# Altium PCB lab_1_kapustin_usb_spi.PcbDoc
Units mm, origin at the board's own origin, x right, y up, seen from the top; angles counter-clockwise.
Board outline 47 x 20 mm, 4 copper layers (Top Layer, Signal Layer 1, Signal Layer 2, Bottom Layer), stack 1.522 mm thick; 28 components, 28 nets, 98 pads, 112 vias.
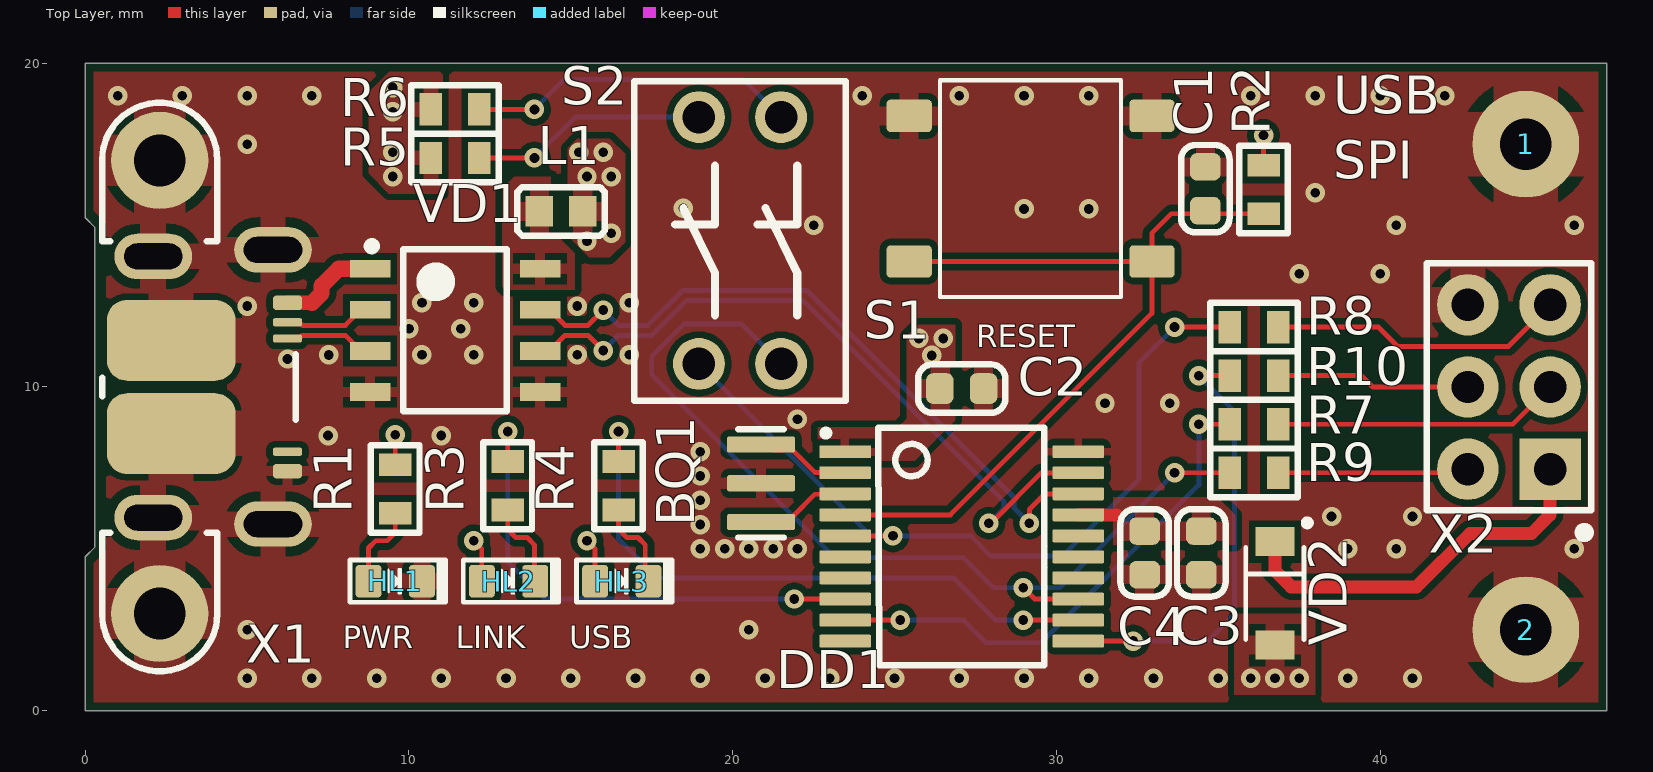
[diagram p0: Top Layer view]
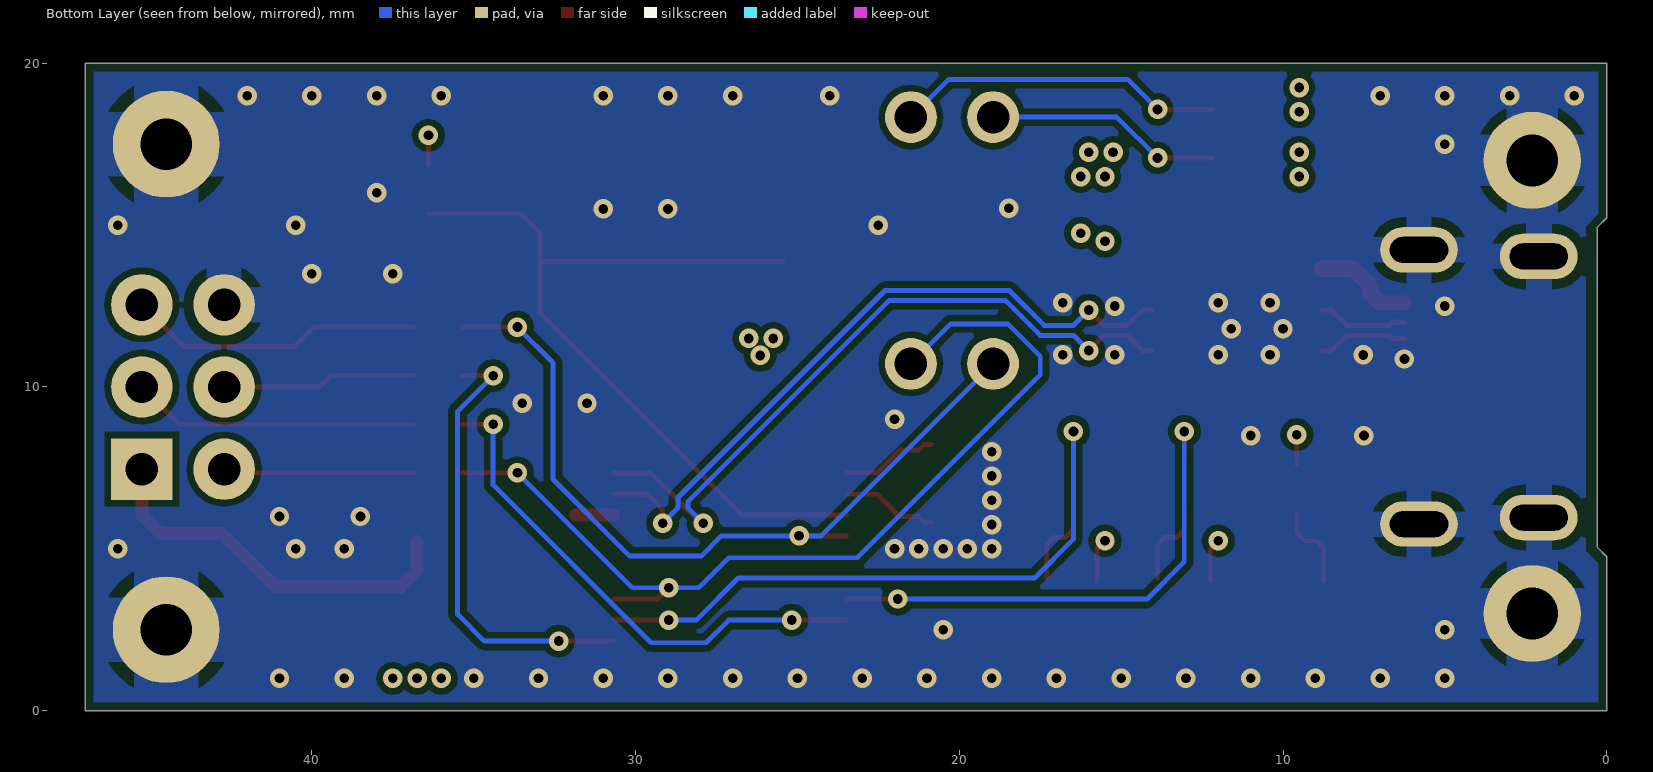
[diagram p1: Bottom Layer view, seen from below]
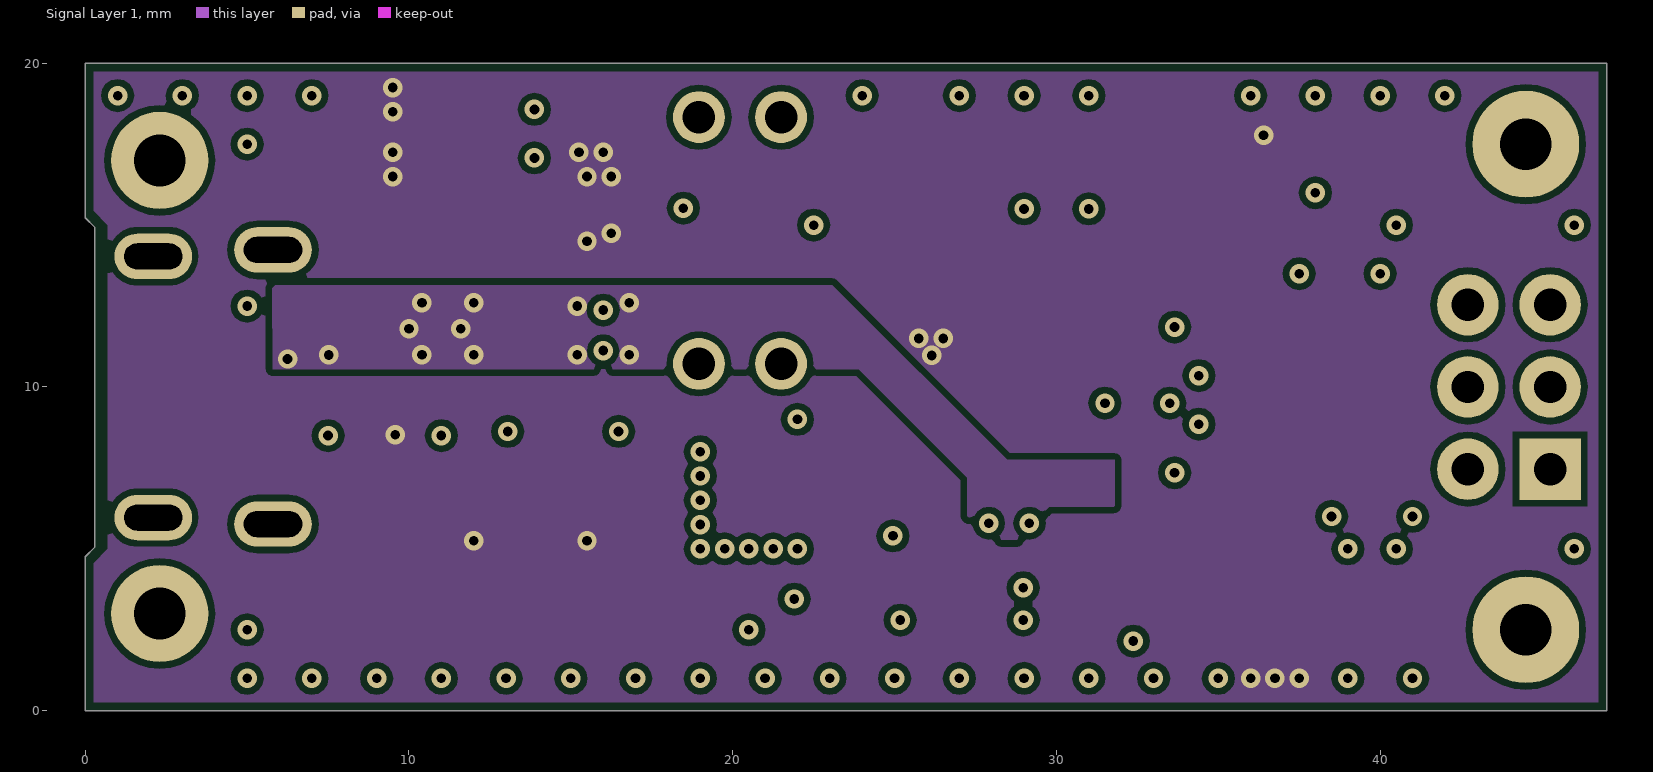
[diagram p2: Signal Layer 1]
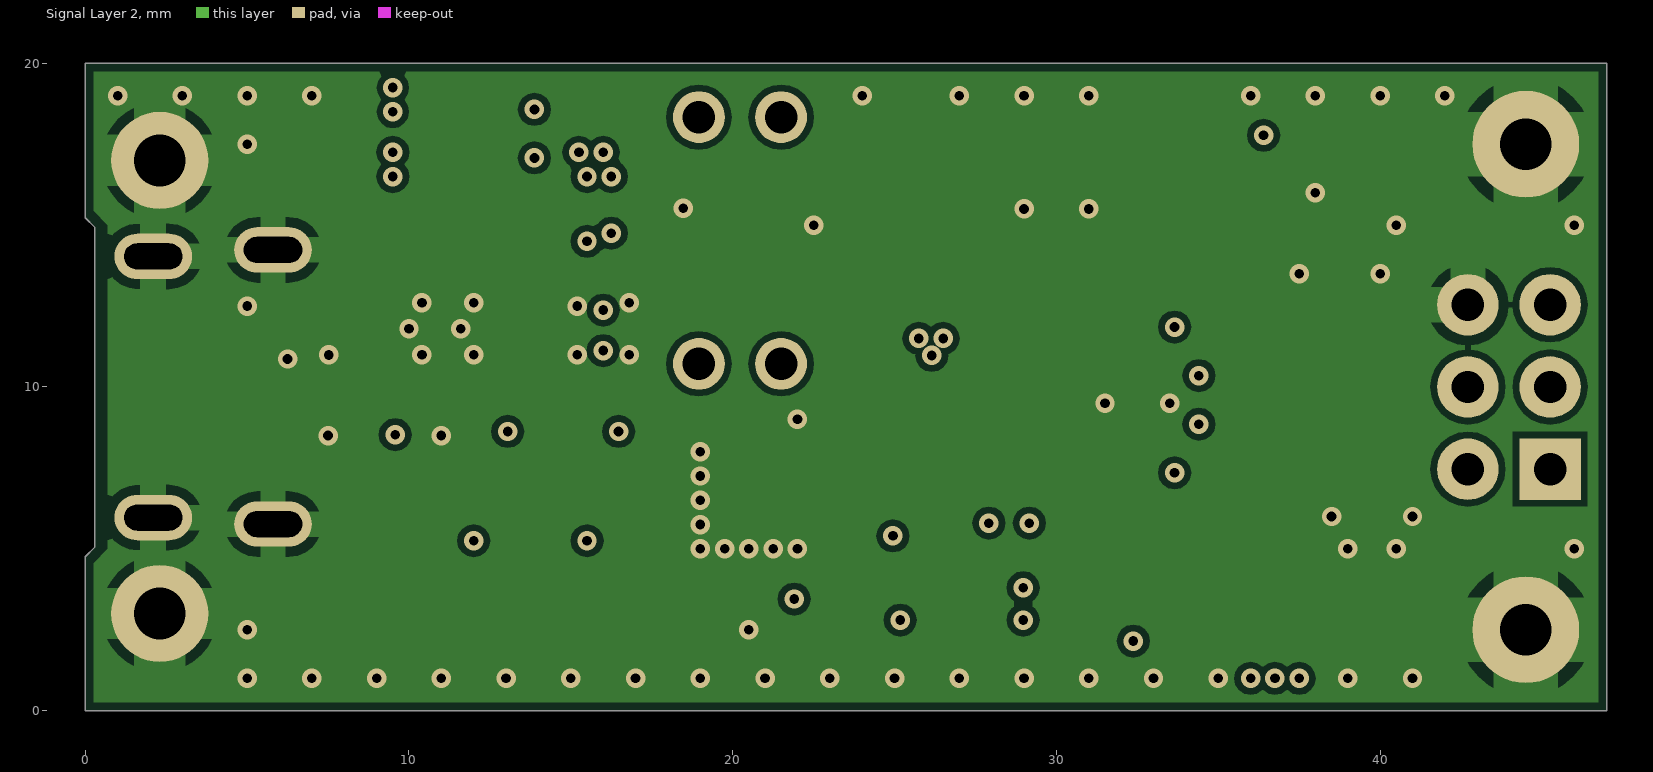
[diagram p3: Signal Layer 2]

## Layer stack, top to bottom
Top Solder: solder mask 0.0102, Solder Resist, Dk 3.5
Top Layer: signal copper 0.018
Prepreg 1: prepreg 0.125, FR4 HiTg170, Dk 5.07
Signal Layer 1: signal copper 0.018
Core 1: core 1.2, FR4, Dk 4.6
Signal Layer 2: signal copper 0.018
Prepreg 2: prepreg 0.125, FR4 HiTg170, Dk 5.07
Bottom Layer: signal copper 0.018
Bottom Solder: solder mask 0.0102, Solder Resist, Dk 3.5

## Board outline
0,0 0,4.755 0.3,5.055 0.3,14.925 0,15.225 0,20 47,20 47,0

## Design rules (kind name [scope] priority, off if disabled: settings)
AcuteAngle min_acute_angle [OnCopper] p1: minimum=3.50000000000000E+0001 checktracksonly=FALSE // Минимальный угол между примитивами топологии
BoardOutlineClearance board_outline_clearance_std [NOT (OnLayer('Bottom Overlay') OR OnLayer('Top Overlay'))] p1: gap=0.25 ignorepadtopadclearanceinfootprint=FALSE except(0: Arc-SplitContinuation Track-SplitContinuation SMDPad-SplitContinuation THPad-SplitContinuation Via-SplitContinuation Fill-SplitContinuation Poly-SplitContinuation Region-SplitContinuation Text-SplitContinuation) // Отступ элементов топологии от края фрезеруемой печатной платы
Clearance clearance_outer_18um_std [OnTopLayer OR OnBottomLayer] p1: gap=0.125 ignorepadtopadclearanceinfootprint=TRUE except(0.2: Arc-Fill Arc-Poly Track-Fill Track-Poly SMDPad-SMDPad SMDPad-Fill SMDPad-Poly THPad-Fill THPad-Poly Via-Fill Via-Poly Fill-Fill Fill-Poly Poly-Poly Poly-Region Poly-Text; 0.25: Arc-Hole Track-Hole SMDPad-Hole THPad-Hole Via-Hole Fill-Hole Poly-Hole Region-Hole Text-Hole) // Зазоры на внешних слоях
Clearance clearance_inner_18um_std [NOT (OnTopLayer Or OnBottomLayer)] p2: gap=0.125 ignorepadtopadclearanceinfootprint=FALSE except(0.2: Arc-Fill Arc-Poly Track-Fill Track-Poly SMDPad-SMDPad SMDPad-Fill SMDPad-Poly THPad-Fill THPad-Poly Via-Fill Via-Poly Fill-Fill Fill-Poly Poly-Poly Poly-Region Poly-Text; 0.25: Arc-Hole Track-Hole SMDPad-Hole THPad-Hole Via-Hole Fill-Hole Poly-Hole Region-Hole Text-Hole) // Зазоры на внутренних слоях
ComponentClearance [All] p1: gap=0 collisioncheckmode=3 verticalgap=0 showdistances=FALSE
DiffPairsRouting "Schematic Differential Pairs Routing_10" [InNet('USB_D_P')] p1: maxlimit=0.254 minlimit=0.15 mostfreqgap=0.254 toplayer_maxgap=0.15 toplayer_prefgap=0.15 toplayer_minwidth=0.155 toplayer_maxwidth=0.155 toplayer_prefwidth=0.155 bottomlayer_maxgap=0.15 bottomlayer_prefgap=0.15 bottomlayer_minwidth=0.155 bottomlayer_maxwidth=0.155 bottomlayer_prefwidth=0.155 impedanceprofiledriven=TRUE impedanceprofileid={1B1F1868-2FFB-4D51-908A-913D90CA9AFC} impedanceprofilevalue=95.000000 maxuncoupledlength=12.7
DiffPairsRouting "Schematic Differential Pairs Routing_9" [InNet('USB_D_N')] p2: maxlimit=0.254 minlimit=0.15 mostfreqgap=0.254 toplayer_maxgap=0.15 toplayer_prefgap=0.15 toplayer_minwidth=0.155 toplayer_maxwidth=0.155 toplayer_prefwidth=0.155 bottomlayer_maxgap=0.15 bottomlayer_prefgap=0.15 bottomlayer_minwidth=0.155 bottomlayer_maxwidth=0.155 bottomlayer_prefwidth=0.155 impedanceprofiledriven=TRUE impedanceprofileid={1B1F1868-2FFB-4D51-908A-913D90CA9AFC} impedanceprofilevalue=95.000000 maxuncoupledlength=12.7
DiffPairsRouting "Schematic Differential Pairs Routing_8" [InNet('CN_D_P')] p3: maxlimit=0.254 minlimit=0.15 mostfreqgap=0.254 toplayer_maxgap=0.15 toplayer_prefgap=0.15 toplayer_minwidth=0.155 toplayer_maxwidth=0.155 toplayer_prefwidth=0.155 bottomlayer_maxgap=0.15 bottomlayer_prefgap=0.15 bottomlayer_minwidth=0.155 bottomlayer_maxwidth=0.155 bottomlayer_prefwidth=0.155 impedanceprofiledriven=TRUE impedanceprofileid={1B1F1868-2FFB-4D51-908A-913D90CA9AFC} impedanceprofilevalue=95.000000 maxuncoupledlength=12.7
DiffPairsRouting "Schematic Differential Pairs Routing" [InNet('CN_D_N')] p4: maxlimit=0.254 minlimit=0.15 mostfreqgap=0.254 toplayer_maxgap=0.15 toplayer_prefgap=0.15 toplayer_minwidth=0.155 toplayer_maxwidth=0.155 toplayer_prefwidth=0.155 bottomlayer_maxgap=0.15 bottomlayer_prefgap=0.15 bottomlayer_minwidth=0.155 bottomlayer_maxwidth=0.155 bottomlayer_prefwidth=0.155 impedanceprofiledriven=TRUE impedanceprofileid={1B1F1868-2FFB-4D51-908A-913D90CA9AFC} impedanceprofilevalue=95.000000 maxuncoupledlength=12.7
DiffPairsRouting "Schematic Differential Pairs Routing_3" [InNet('USB_D_N')] p5: maxlimit=0.254 minlimit=0.15 mostfreqgap=0.254 toplayer_maxgap=0.15 toplayer_prefgap=0.15 toplayer_minwidth=0.155 toplayer_maxwidth=0.155 toplayer_prefwidth=0.155 bottomlayer_maxgap=0.15 bottomlayer_prefgap=0.15 bottomlayer_minwidth=0.155 bottomlayer_maxwidth=0.155 bottomlayer_prefwidth=0.155 impedanceprofiledriven=TRUE impedanceprofileid={1B1F1868-2FFB-4D51-908A-913D90CA9AFC} impedanceprofilevalue=95.000000 maxuncoupledlength=12.7
DiffPairsRouting "Schematic Differential Pairs Routing_2" [InNet('D_IN_N')] p6: maxlimit=0.254 minlimit=0.15 mostfreqgap=0.254 toplayer_maxgap=0.15 toplayer_prefgap=0.15 toplayer_minwidth=0.155 toplayer_maxwidth=0.155 toplayer_prefwidth=0.155 bottomlayer_maxgap=0.15 bottomlayer_prefgap=0.15 bottomlayer_minwidth=0.155 bottomlayer_maxwidth=0.155 bottomlayer_prefwidth=0.155 impedanceprofiledriven=TRUE impedanceprofileid={1B1F1868-2FFB-4D51-908A-913D90CA9AFC} impedanceprofilevalue=95.000000 maxuncoupledlength=12.7
DiffPairsRouting diff_pairs_routing [All] p7: maxlimit=0.254 minlimit=0.127 mostfreqgap=0.254 toplayer_maxgap=0.127 toplayer_prefgap=0.127 toplayer_minwidth=0.143 toplayer_maxwidth=0.143 toplayer_prefwidth=0.143 midlayer1_minwidth=0.381 midlayer1_maxwidth=0.381 midlayer1_prefwidth=0.381 midlayer2_minwidth=0.381 midlayer2_maxwidth=0.381 midlayer2_prefwidth=0.381 bottomlayer_maxgap=0.127 bottomlayer_prefgap=0.127 bottomlayer_minwidth=0.143 bottomlayer_maxwidth=0.143 bottomlayer_prefwidth=0.143 impedanceprofiledriven=TRUE impedanceprofileid={FD46899E-B5A2-4EF5-A302-5D2DB6A51F35} maxuncoupledlength=12.7 // Правила трассировки дифференциальных пар
HoleSize min_hole_size_std [IsPad] p1: absolutevalues=TRUE maxlimit=5.9 minlimit=0.6 maxpercent=80.000 minpercent=20.000 // Диаметр межслойного переходного отверстия
HoleSize min_hole_size_via_std [IsVia] p2: absolutevalues=TRUE maxlimit=5.9 minlimit=0.3 maxpercent=80.000 minpercent=20.000 // Минимальный диаметр монтажного отверстия
HoleToHoleClearance hole_to_hole_clearance_std [All] p1: gap=0.2 allowstackedmicrovias=FALSE // Минимальное расстояние между краями двух отверстий
MinimumAnnularRing min_via_ar_std [All] p1: minimumring=0.15 // Поясок площадки переходного отверстия (Annular ring VIA)
MinimumAnnularRing min_pad_ar_std [All] p2: minimumring=0.2 // Поясок монтажной контактной площадки (Annular ring PAD)
MinimumSolderMaskSliver min_solder_mask_bridge_std [All] p1: minsoldermaskwidth=0.15 // Мнимальная ширина масочного мостика
PlaneClearance plane_clearance_18um_std [All] p1: clearance=0.2 // Отступ полигона (для слоя plane) от элементов топологии
PlaneConnect [All] p1: planeconnectstyle=Relief reliefexpansion=0.5 reliefentries=4 reliefconductorwidth=0.2 reliefairgap=0.2
PolygonConnect poly_connect_to_pad<=0.3 [(AsMM(PadXSize_AllLayers)<=0.301) or (AsMM(PadYSize_AllLayers)<=0.301)] p1: thpad.connectstyle=Relief thpad.reliefconductorwidth=0.2 thpad.reliefentries=4 thpad.polygonreliefangle="90 Angle" thpad.airgapwidth=0.2 smdpad.connectstyle=Relief smdpad.reliefconductorwidth=0.2 smdpad.reliefentries=4 smdpad.polygonreliefangle="90 Angle" smdpad.airgapwidth=0.2 via.connectstyle=Direct via.reliefconductorwidth=0.254 via.reliefentries=4 via.polygonreliefangle="90 Angle" via.airgapwidth=0.254 // Правила подключения полигонов для падов от 0,3мм и меньше
PolygonConnect poly_connect_to_pad<=0.4 [(AsMM(PadXSize_AllLayers)<=0.401) or (AsMM(PadYSize_AllLayers)<=0.401)] p2: thpad.connectstyle=Relief thpad.reliefconductorwidth=0.26 thpad.reliefentries=4 thpad.polygonreliefangle="90 Angle" thpad.airgapwidth=0.2 smdpad.connectstyle=Relief smdpad.reliefconductorwidth=0.26 smdpad.reliefentries=4 smdpad.polygonreliefangle="90 Angle" smdpad.airgapwidth=0.2 via.connectstyle=Direct via.reliefconductorwidth=0.254 via.reliefentries=4 via.polygonreliefangle="90 Angle" via.airgapwidth=0.254 // Правила подключения полигонов для падов от 0,4 и меньше
PolygonConnect poly_connect_to_pad<=0.6 [(AsMM(PadXSize_AllLayers)<=0.601) or (AsMM(PadYSize_AllLayers)<=0.601)] p3: thpad.connectstyle=Relief thpad.reliefconductorwidth=0.33 thpad.reliefentries=4 thpad.polygonreliefangle="90 Angle" thpad.airgapwidth=0.2 smdpad.connectstyle=Relief smdpad.reliefconductorwidth=0.33 smdpad.reliefentries=4 smdpad.polygonreliefangle="90 Angle" smdpad.airgapwidth=0.2 via.connectstyle=Direct via.reliefconductorwidth=0.254 via.reliefentries=4 via.polygonreliefangle="90 Angle" via.airgapwidth=0.254 // Правила подключения полигонов для падов от 0,6мм и меньше
PolygonConnect poly_connect_to_pad<=0.7 [(AsMM(PadXSize_AllLayers)<=0.701) or (AsMM(PadYSize_AllLayers)<=0.701)] p4: thpad.connectstyle=Relief thpad.reliefconductorwidth=0.46 thpad.reliefentries=4 thpad.polygonreliefangle="90 Angle" thpad.airgapwidth=0.2 smdpad.connectstyle=Relief smdpad.reliefconductorwidth=0.46 smdpad.reliefentries=4 smdpad.polygonreliefangle="90 Angle" smdpad.airgapwidth=0.2 via.connectstyle=Direct via.reliefconductorwidth=0.254 via.reliefentries=4 via.polygonreliefangle="90 Angle" via.airgapwidth=0.254 // Правила подключения полигонов для падов от 0,7мм и меньше
PolygonConnect poly_connect_to_pad<=0.8 [(AsMM(PadXSize_AllLayers)<=0.8)or(AsMM(PadYSize_AllLayers)<=0.8)] p5: thpad.connectstyle=Relief thpad.reliefconductorwidth=0.53 thpad.reliefentries=4 thpad.polygonreliefangle="90 Angle" thpad.airgapwidth=0.3 smdpad.connectstyle=Relief smdpad.reliefconductorwidth=0.53 smdpad.reliefentries=4 smdpad.polygonreliefangle="90 Angle" smdpad.airgapwidth=0.2 via.connectstyle=Direct via.reliefconductorwidth=0.254 via.reliefentries=4 via.polygonreliefangle="90 Angle" via.airgapwidth=0.254 // Правила подключения полигонов для падов от 0,8мм и меньше
PolygonConnect poly_connect_to_pad<=1 [(AsMM(PadXSize_AllLayers)<=1.01)or(AsMM(PadYSize_AllLayers)<=1.01)] p6: thpad.connectstyle=Relief thpad.reliefconductorwidth=0.6 thpad.reliefentries=4 thpad.polygonreliefangle="90 Angle" thpad.airgapwidth=0.3 smdpad.connectstyle=Relief smdpad.reliefconductorwidth=0.6 smdpad.reliefentries=4 smdpad.polygonreliefangle="90 Angle" smdpad.airgapwidth=0.2 via.connectstyle=Direct via.reliefconductorwidth=0.254 via.reliefentries=4 via.polygonreliefangle="90 Angle" via.airgapwidth=0.254 // Правила подключения полигонов для падов от 1мм и меньше
PolygonConnect poly_connect_to_pad<=1.3 [(AsMM(PadXSize_AllLayers)<=1.31)or(AsMM(PadYSize_AllLayers)<=1.31)] p7: thpad.connectstyle=Relief thpad.reliefconductorwidth=0.66 thpad.reliefentries=4 thpad.polygonreliefangle="90 Angle" thpad.airgapwidth=0.3 smdpad.connectstyle=Relief smdpad.reliefconductorwidth=0.86 smdpad.reliefentries=4 smdpad.polygonreliefangle="90 Angle" smdpad.airgapwidth=0.2 via.connectstyle=Direct via.reliefconductorwidth=0.254 via.reliefentries=4 via.polygonreliefangle="90 Angle" via.airgapwidth=0.254 // Правила подключения полигонов для падов от 1,3мм и меньше
PolygonConnect poly_connect_to_pad<=1.6 [(AsMM(PadXSize_AllLayers)<=1.61)or(AsMM(PadYSize_AllLayers)<=1.61)] p8: thpad.connectstyle=Relief thpad.reliefconductorwidth=0.8 thpad.reliefentries=4 thpad.polygonreliefangle="90 Angle" thpad.airgapwidth=0.3 smdpad.connectstyle=Relief smdpad.reliefconductorwidth=1 smdpad.reliefentries=4 smdpad.polygonreliefangle="90 Angle" smdpad.airgapwidth=0.2 via.connectstyle=Direct via.reliefconductorwidth=0.254 via.reliefentries=4 via.polygonreliefangle="90 Angle" via.airgapwidth=0.254 // Правила подключения полигонов для падов от 1,6мм и меньше
PolygonConnect poly_connect_to_pad<=1.8 [(AsMM(PadXSize_AllLayers)<=1.8)or(AsMM(PadYSize_AllLayers)<=1.8)] p9: thpad.connectstyle=Relief thpad.reliefconductorwidth=1 thpad.reliefentries=4 thpad.polygonreliefangle="90 Angle" thpad.airgapwidth=0.3 smdpad.connectstyle=Relief smdpad.reliefconductorwidth=1.2 smdpad.reliefentries=4 smdpad.polygonreliefangle="90 Angle" smdpad.airgapwidth=0.2 via.connectstyle=Direct via.reliefconductorwidth=0.254 via.reliefentries=4 via.polygonreliefangle="90 Angle" via.airgapwidth=0.254 // Правила подключения полигонов для падов от 1,8мм и меньше
PolygonConnect poly_connect_to_pad<=2 [(AsMM(PadXSize_AllLayers)<=2.01)or(AsMM(PadYSize_AllLayers)<=2.01)] p10: thpad.connectstyle=Relief thpad.reliefconductorwidth=1.1 thpad.reliefentries=4 thpad.polygonreliefangle="90 Angle" thpad.airgapwidth=0.3 smdpad.connectstyle=Relief smdpad.reliefconductorwidth=1.4 smdpad.reliefentries=4 smdpad.polygonreliefangle="90 Angle" smdpad.airgapwidth=0.2 via.connectstyle=Direct via.reliefconductorwidth=0.254 via.reliefentries=4 via.polygonreliefangle="90 Angle" via.airgapwidth=0.254 // Правила подключения полигонов для падов от 2мм и меньше
PolygonConnect poly_connect_to_pad<=2.3 [(AsMM(PadXSize_AllLayers)<=2.31)or(AsMM(PadYSize_AllLayers)<=2.31)] p11: thpad.connectstyle=Relief thpad.reliefconductorwidth=1.2 thpad.reliefentries=4 thpad.polygonreliefangle="90 Angle" thpad.airgapwidth=0.3 smdpad.connectstyle=Relief smdpad.reliefconductorwidth=1.4 smdpad.reliefentries=4 smdpad.polygonreliefangle="90 Angle" smdpad.airgapwidth=0.2 via.connectstyle=Direct via.reliefconductorwidth=0.254 via.reliefentries=4 via.polygonreliefangle="90 Angle" via.airgapwidth=0.254 // Правила подключения полигонов для падов от 2,3мм и меньше
PolygonConnect poly_connect_to_pad<=2.5 [(AsMM(PadXSize_AllLayers)<=2.51)or(AsMM(PadYSize_AllLayers)<=2.51)] p12: thpad.connectstyle=Relief thpad.reliefconductorwidth=1.2 thpad.reliefentries=4 thpad.polygonreliefangle="90 Angle" thpad.airgapwidth=0.3 smdpad.connectstyle=Relief smdpad.reliefconductorwidth=1.4 smdpad.reliefentries=4 smdpad.polygonreliefangle="90 Angle" smdpad.airgapwidth=0.2 via.connectstyle=Direct via.reliefconductorwidth=0.254 via.reliefentries=4 via.polygonreliefangle="90 Angle" via.airgapwidth=0.254 // Правила подключения полигонов для падов от 2,5мм и меньше
PolygonConnect poly_connect_to_pad<=2.7 [(AsMM(PadXSize_AllLayers)<=2.71)or(AsMM(PadYSize_AllLayers)<=2.71)] p13: thpad.connectstyle=Relief thpad.reliefconductorwidth=1.4 thpad.reliefentries=4 thpad.polygonreliefangle="90 Angle" thpad.airgapwidth=0.3 smdpad.connectstyle=Relief smdpad.reliefconductorwidth=1.6 smdpad.reliefentries=4 smdpad.polygonreliefangle="90 Angle" smdpad.airgapwidth=0.2 via.connectstyle=Direct via.reliefconductorwidth=0.254 via.reliefentries=4 via.polygonreliefangle="90 Angle" via.airgapwidth=0.254 // Правила подключения полигонов для падов от 2,7мм и меньше
PolygonConnect poly_connect_to_pad<=3 [(AsMM(PadXSize_AllLayers)<=3.01)or(AsMM(PadYSize_AllLayers)<=3.01)] p14: thpad.connectstyle=Relief thpad.reliefconductorwidth=1.6 thpad.reliefentries=4 thpad.polygonreliefangle="90 Angle" thpad.airgapwidth=0.3 smdpad.connectstyle=Relief smdpad.reliefconductorwidth=1.8 smdpad.reliefentries=4 smdpad.polygonreliefangle="90 Angle" smdpad.airgapwidth=0.2 via.connectstyle=Direct via.reliefconductorwidth=0.254 via.reliefentries=4 via.polygonreliefangle="90 Angle" via.airgapwidth=0.254 // Правила подключения полигонов для падов от 3мм и меньше
PolygonConnect poly_connect_to_pad<=7 [(AsMM(PadXSize_AllLayers)<7.01)or(AsMM(PadYSize_AllLayers)<=7.01)] p15: thpad.connectstyle=Relief thpad.reliefconductorwidth=2 thpad.reliefentries=4 thpad.polygonreliefangle="90 Angle" thpad.airgapwidth=0.4 smdpad.connectstyle=Relief smdpad.reliefconductorwidth=2 smdpad.reliefentries=4 smdpad.polygonreliefangle="90 Angle" smdpad.airgapwidth=0.3 via.connectstyle=Direct via.reliefconductorwidth=0.254 via.reliefentries=4 via.polygonreliefangle="90 Angle" via.airgapwidth=0.254 // Правила подключения полигонов для падов от 7мм и меньше
PolygonConnect poly_connect_to_pad [All] p16: thpad.connectstyle=Relief thpad.reliefconductorwidth=0.25 thpad.reliefentries=4 thpad.polygonreliefangle="90 Angle" thpad.airgapwidth=0.2 smdpad.connectstyle=Relief smdpad.reliefconductorwidth=0.25 smdpad.reliefentries=4 smdpad.polygonreliefangle="90 Angle" smdpad.airgapwidth=0.2 via.connectstyle=Direct via.reliefconductorwidth=0.25 via.reliefentries=4 via.polygonreliefangle="90 Angle" via.airgapwidth=0.2 // Правила подключения полигонов общие
RoutingCorners [All] p1 off: cornerstyle=45-Degree minsetback=2.5 maxsetback=2.5
RoutingVias [All] p1: holewidth=0.3 width=0.6 viastyle="Through Hole" minholewidth=0.3 minwidth=0.6 maxholewidth=5.9 maxwidth=6.4
SilkToSilkClearance silk_to_silk_clearance_std [All] p1 off: silktosilkclearance=0.15 // Отступ текста шелкографии от других примитивов шелкографии
SilkToSolderMaskClearance silk_to_solder_mask_clearance_std [IsPad] p1 off: minsilkscreentomaskgap=0.15 clearancetoexposedcopper=FALSE // Минимальное расстояние между элементами шелкографии и вскрытой медью
SolderMaskExpansion solder_mask_expansion_std [All] p1: expansion=0.05 // Припуск паяльной масски
UnRoutedNet [All] p1: checkbadconnections=TRUE
Width width_18um_std [All] p1: maxlimit=10 minlimit=0.125 preferedwidth=0.15 checkconnectedcopper=TRUE // Ширина проводников (общая)
19 further rules are at their usual default settings.

## Classes and differential pairs
differential pair class USB_SIGNALS: CN_D USB_D
component class +5V: X2
differential pair USB_D: +USB_D_P -USB_D_N
differential pair CN_D: +CN_D_P -CN_D_N

## Components (designator, comment, footprint, x,y, rotation, side; value= is the part's Value field where it differs from the comment)
1 "MOUNTING_HOLE" HOLE_1,6X3,3 44.5,17.5 r90 top
2 "MOUNTING_HOLE" HOLE_1,6X3,3 44.5,2.5 r90 top
BQ1 "CSTCE12M0G52A-R0" CSTCE-3_320X130X40 20.875,7.025 r0 top
C1 "0,1 мк" C0603 34.6,16.125 r270 top
C2 "4,7 мк" C0603 27.075,9.95 r0 top
C3 "2,2 мк" C0603 34.475,4.875 r270 top
C4 "0,22 мк" C0603 32.725,4.875 r270 top
DD1 "MCP2210-I/SS" SSOP-20_780X720X200 27.075,5.075 r0 top
HL1 "KP-1608SGC" D0603 9.575,4 r0 top
HL2 "KP-1608YC" D0603 13.075,4 r0 top
HL3 "KP-1608YC" D0603 16.575,4 r0 top
L1 "BLM18PG221SN1D" L0603 14.7,15.425 r0 top
R1 "220" R0603 9.575,6.85 r90 top
R2 "10 к" R0603 36.4,16.1 r270 top
R3 "330" R0603 13.05,6.95 r270 top
R4 "330" R0603 16.475,6.95 r270 top
R5 "10 к" R0603 11.425,17.075 r180 top
R6 "10 к" R0603 11.425,18.575 r180 top
R7 "33" R0603 36.1,8.85 r0 top
R8 "33" R0603 36.1,11.85 r0 top
R9 "33" R0603 36.1,7.35 r0 top
R10 "33" R0603 36.1,10.35 r0 top
S1 "KLS7-TS6604-5.0-180-B" KLS7-TS6604_500 29.2,16.125 r0 top
S2 "DS1040-02RN" DS1040-02RN 20.225,14.525 r0 top
VD1 "USB6B1" SO-8 11.425,11.75 r0 top
VD2 "MBR140SFT1G" SOD-123FL_290X180X98 36.75,3.625 r90 top
X1 "2108877-1" 2108877-1 2.55,10 r90 top
X2 "DS1021-2*3SF11" PLS-2,54-2X3-THT-V 43.98,10 r90 top

## Footprints (in the part's own frame and the unit in brackets; to place one, negate y for a bottom-side part, rotate by r counter-clockwise, add the part's x,y. Pads: shape width x height; smd on the part's side, far side on the other; paste and mask are expansions set on the pad)
2108877-1 [mm] "Micro USB-B, Flanged"
  rrect50% 0.45x0.9 smd: 1(2.6,-3.696) 5(-2.6,-3.696)
  rrect50% 0.25x0.9 smd: 2(2,-3.696) 3(1.5,-3.696) 4(-2,-3.696)
  round 3 hole 1.6: TP1(-7,0.25) TP1(7,0.25)
  oval 1.4x2.4 hole 0.8 slot 1.8 at 90 deg mask+0.102: TP1(-4.235,-3.25) TP1(-4.035,0.45) TP1(4.035,0.45) TP1(4.235,-3.25)
  rrect50% 2.5x3.98 smd: TP1(-1.441,-0.104) TP1(1.441,-0.104)
  silkscreen extent -8.78,-3.95 8.78,2.03, body extent -8.9,-3.95 8.9,3.95, height 3.39
C0603 [mm] "Chip Capacitor, 2-Leads, Body 1,60x0,80mm, IPC Medium Density"
  rrect50% 0.85x0.95 smd: 1(-0.675,0) 2(0.675,0)
  Top Layer pour cut-out: -0.254,0.5 -0.254,-0.5 0.254,-0.5 0.254,0.5
  silkscreen extent -1.35,-0.75 1.35,0.75, body extent -0.85,-0.45 0.85,0.45, height 0.9
CSTCE-3_320X130X40 [mm] "CSTCE_G15C/CSTCE_G/CSTCE_G_Z"
  rrect25% 2.1x0.5 smd paste-0.025 mask+0.1: 1(0,1.2) 2(0,0) 3(0,-1.2)
  silkscreen extent -0.7,-1.67 0.7,1.68, body extent -0.7,-1.68 0.7,1.67, height 0.75
D0603 [mm]
  rrect25% 0.8x1 smd paste-10 mask+0.1: 1(-0.825,0) 2(0.825,0)
  silkscreen extent -1.4,-0.65 1.55,0.65, body extent -0.81,-0.4 0.81,0.4, height 0.6
DS1040-02RN [mm]
  round 1.6 hole 1: 1(-1.27,3.81) 2(-1.27,-3.81) 3(1.27,3.81) 4(1.27,-3.81)
  silkscreen extent -3.27,-4.95 3.27,4.92, body extent -3.27,-4.95 3.27,4.95, height 6.8
HOLE_1,6X3,3 [mm]
  round 3.3 hole 1.6: 1(0,0)
KLS7-TS6604_500 [mm] "6.5x6.5mm SMD tact switch 5mm stem"
  rrect25% 1.4x1 smd: 1(-3.75,2.25) 1(3.75,2.25) 2(-3.75,-2.25) 2(3.75,-2.25)
  silkscreen extent -2.79,-3.35 2.79,3.35, body extent -4,-3.25 4,3.25, height 4.3
L0603 [mm]
  rect 0.85x0.95 smd: 1(-0.675,0) 2(0.675,0)
  silkscreen extent -1.35,-0.75 1.35,0.75, body extent -0.85,-0.45 0.85,0.45, height 0.9
PLS-2,54-2X3-THT-V [mm] "PLS-2x3"
  rect 1.9x1.9 hole 1: 1(-2.54,-1.27)
  round 1.9 hole 1: 2(-2.54,1.27) 3(0,-1.27)
  round 1.9 hole 1 mask+0.102: 4(0,1.27) 5(2.54,-1.27) 6(2.54,1.27)
  silkscreen extent -4.5,-2.55 3.81,2.54, body extent -3.81,-2.54 3.81,2.54, height 8.59
R0603 [mm]
  rect 0.7x1 smd: 1(-0.75,0) 2(0.75,0)
  silkscreen extent -1.35,-0.75 1.35,0.75, body extent -0.8,-0.43 0.8,0.42, height 0.45
SO-8 [mm]
  rect 1.25x0.55 smd: 1(-2.625,1.905) 2(-2.625,0.635) 3(-2.625,-0.635) 4(-2.625,-1.905) 5(2.625,-1.905) 6(2.625,-0.635) 7(2.625,0.635) 8(2.625,1.905)
  silkscreen extent -2.7,-2.5 1.6,2.72, body extent -3.1,-2.5 3.1,2.5, height 1.75
SOD-123FL_290X180X98 [mm]
  rect 0.9x1.2 smd: 1(-1.6,0) 2(1.6,0)
  silkscreen extent -1.43,-1.1 2.28,0.9, body extent -1.83,-0.83 1.87,0.77, height 1.12
SSOP-20_780X720X200 [mm] "SSOP-20, 7,8mm x 7,2mm, pitch 0,65mm"
  rect 1.6x0.4 smd paste-0.025 mask+0.05: 1(-3.6,2.925)
  rrect25% 1.6x0.4 smd paste-0.025 mask+0.05: 2(-3.6,2.275) 3(-3.6,1.625) 4(-3.6,0.975) 5(-3.6,0.325) 6(-3.6,-0.325) 7(-3.6,-0.975) 8(-3.6,-1.625) 9(-3.6,-2.275) 10(-3.6,-2.925) 11(3.6,-2.925) 12(3.6,-2.275) 13(3.6,-1.625) 14(3.6,-0.975) 15(3.6,-0.325) 16(3.6,0.325) 17(3.6,0.975) 18(3.6,1.625) 19(3.6,2.275) 20(3.6,2.925)
  silkscreen extent -4.2,-3.66 2.55,3.67, body extent -3.95,-3.66 3.95,3.66, height 1.98

## Part data
1 2: library part fstn0011, id=fstn0011, Диаметр отверстия="1,6 мм", Наименование="Отверстие 1,6x3,3", Описание="Отверстие под М1,5", Параметры металлизации="3,3 мм"
BQ1: library part q0001, HelpURL=https://www.murata.com/en-us/api/pdfdownloadapi?cate=&partno=CSTCE12M0G52A-R0, id=q0001, Корпус=3,2*1,3*0,7, Наименование=CSTCE12M0G52A-R0, Описание="Кварцевый резонатор 12 МГц со встроенными нагрузочными конденсаторами", Производитель=Murata, Промывка=Разрешена, Температура окружающей среды (корпуса), макс#="+125 °C", Температура окружающей среды (корпуса), мин#="-40 °C", Точность="±0,5 %", Фамилия=Капустин, Частота="12 МГц"
C1: library part c0007, "Конденсатор", HelpURL=http://weblib.samsungsem.com/mlcc/mlcc-ec-data-sheet.do?partNumber=CL10B104KB8NNN, id=c0007, Корпус=0603, Наименование=CL10B104KB8NNN, Напряжение="50 В", Номинал="0,1 мк", Описание="Конденсатор керамический 0603 0,1 мкФ 50 В ±10 % X7R", Отклонение="±10 %", Примечание="В наименовании убрана последняя буква, обозначающая упаковку", Производитель=Samsung, ТКЕ=X7R, Фамилия=Черемный
C2: library part c0009, "Конденсатор", HelpURL=http://weblib.samsungsem.com/mlcc/mlcc-ec-data-sheet.do?partNumber=CL10A475KA8NQN, id=c0009, Корпус=0603, Наименование=CL10A475KA8NQN, Напряжение="25 В", Номинал="4,7 мк", Описание="Конденсатор керамический 0603 4,7 мкФ 25 В ±10 % X5R", Отклонение="±10 %", Примечание="В наименовании убрана последняя буква, обозначающая упаковку", Производитель=Samsung, ТКЕ=X5R, Фамилия=Черемный
C3: library part c0020, "Конденсатор", HelpURL=http://weblib.samsungsem.com/mlcc/mlcc-ec-data-sheet.do?partNumber=CL10B225KP8NNN, id=c0020, Корпус=0603, Наименование=CL10B225KP8NNN, Напряжение="10 В", Номинал="2,2 мк", Описание="Конденсатор керамический 0603 2,2 мкФ 10 В ±10 % X7R", Отклонение="±10 %", Примечание="В наименовании убрана последняя буква, обозначающая упаковку", Производитель=Samsung, ТКЕ=X7R, Фамилия=Черемный
C4: library part c0027, "Конденсатор", HelpURL=http://weblib.samsungsem.com/mlcc/mlcc-ec-data-sheet.do?partNumber=CL10B224KA8NNN, id=c0027, Корпус=0603, Наименование=CL10B224KA8NNN, Напряжение="25 В", Номинал="0,22 мк", Описание="Конденсатор керамический 0603 0,22 мкФ 25 В ±10 % X7R", Отклонение="±10 %", Примечание="В наименовании убрана последняя буква, обозначающая упаковку", Производитель=Samsung, ТКЕ=X7R, Фамилия=Черемный
DD1: library part MCP2210ISS, Наименование=MCP2210-I/SS
HL1: library part led0004, HelpURL=http://www.farnell.com/datasheets/2045827.pdf?_ga=2.72147859.1066726363.1573580702-223521920.1573064505, id=led0004, Корпус=D0603, Максимальное обратное напряжение="5 В", Максимальное прямое напряжение="2,5 В", Максимальный импульсный прямой ток="140 мА", Максимальный обратный ток="11 мкА", Наименование=KP-1608SGC, Описание="Светодиод зеленый SMD 0603", Примечание="Не найти документацию на свйте производителя", Производитель=Kingbright, Прямой ток="20 мА", Температура окружающей среды (корпуса), макс#="+85 °C", Температура окружающей среды (корпуса), мин#="-40 °C", Фамилия=Капустин, Цвет=Зеленый
HL2 HL3: library part led0003, HelpURL=http://www.farnell.com/datasheets/2045948.pdf?_ga=2.105218179.1066726363.1573580702-223521920.1573064505, id=led0003, Корпус=D0603, Максимальное обратное напряжение="5 В", Максимальное прямое напряжение="2,5 В", Максимальный импульсный прямой ток="140 мА", Максимальный обратный ток="10 мкА", Наименование=KP-1608YC, Описание="Светодиод желтый SMD 0603", Примечание="Не найти документацию на свйте производителя", Производитель=Kingbright, Прямой ток="20 мА", Температура окружающей среды (корпуса), макс#="+85 °C", Температура окружающей среды (корпуса), мин#="-40 °C", Фамилия=Капустин, Цвет=Желтый
L1: library part ind0014, HelpURL=https://www.murata.com/en-eu/products/productdetail?partno=BLM18PG221SN1%23, id=ind0014, Добротность="не указана", Индуктивность="220 Ом @ 100 МГц", Корпус=0603, Максимальный ток="1,4 А", Наименование=BLM18PG221SN1D, Номинал="220 Ом", Описание="Ферритовая бусина 220 Ом @ 100МГц", Отклонение=±25%, Производитель=Murata, Сопротивление обмотки="0,1 Ом", Температура окружающей среды (корпуса), макс#="+125 °C", Температура окружающей среды (корпуса), мин#="-55 °C", Фамилия=Капустин
R1: library part r0232, "Резистор 0,063Вт", HelpURL=https://www.yageo.com/upload/media/product/products/datasheet/rchip/PYu-RC_Group_51_RoHS_L_10.pdf, id=r0232, Корпус=0603, Наименование=RC0603FR-07220RL, Напряжение="75 В", Номинал=220, Описание="Резистор чип 0603 220 Ом 0,1 Вт ±1 %", Отклонение="±1 %", Производитель=YAGEO, Температура окружающей среды (корпуса), макс#="+155 °C", Температура окружающей среды (корпуса), мин#="-55 °C", Температурный коэффициент сопротивления="200 ppm", Фамилия=Капустин
R2 R5 R6: library part r0006, "Резистор 0,063Вт", HelpURL=https://www.yageo.com/upload/media/product/products/datasheet/rchip/PYu-RC_Group_51_RoHS_L_10.pdf, id=r0006, Корпус=0603, Наименование=RC0603FR-0710KL, Напряжение="75 В", Номинал="10 к", Описание="Резистор чип 0603 10 кОм 0,1 Вт ±1 %", Отклонение="±1 %", Производитель=YAGEO, Температура окружающей среды (корпуса), макс#="+155 °C", Температура окружающей среды (корпуса), мин#="-55 °C", Температурный коэффициент сопротивления="200 ppm", Фамилия=Капустин
R3 R4: library part r0034, "Резистор 0,063Вт", HelpURL=https://www.yageo.com/upload/media/product/products/datasheet/rchip/PYu-RC_Group_51_RoHS_L_10.pdf, id=r0034, Корпус=0603, Наименование=RC0603FR-07330RL, Напряжение="75 В", Номинал=330, Описание="Резистор чип 0603 300 Ом 0,1 Вт ±1 %", Отклонение="±1 %", Производитель=YAGEO, Температура окружающей среды (корпуса), макс#="+155 °C", Температура окружающей среды (корпуса), мин#="-55 °C", Температурный коэффициент сопротивления="100 ppm", Фамилия=Капустин
R7 R8 R9 R10: library part r0214, "Резистор 0,063Вт", HelpURL=https://www.yageo.com/upload/media/product/products/datasheet/rchip/PYu-RC_Group_51_RoHS_L_10.pdf, id=r0214, Корпус=0603, Наименование=RC0603FR-0733RL, Напряжение="75 В", Номинал=33, Описание="Резистор чип 0603 33 Ом 0,1 Вт ±1 %", Отклонение="±1 %", Производитель=YAGEO, Температура окружающей среды (корпуса), макс#="+155 °C", Температура окружающей среды (корпуса), мин#="-55 °C", Температурный коэффициент сопротивления="200 ppm", Фамилия=Капустин
S1: library part sw0003, HelpURL=http://www.klsele.com/admin/product_upload/20120515130956KLS7-TS6604.pdf, id=sw0003, Капустин=Черемный, Количество контактов=4, Корпус=6х6х3,5, Наименование=KLS7-TS6604-5.0-180-B, Описание="Тактовая кнопка поверхностного монтажа", Производитель=KLS, Промывка="Не указано (запрещена)", Сопротивление контакта="50 мОм", Температура окружающей среды (корпуса), макс#="+70 °C", Температура окружающей среды (корпуса), мин#="-20 °C", Ток нагрузки="50 мА @ 12 В"
S2: library part sw0002, HelpURL=http://www.connfly.com/userfiles/image/UpLoadFile/File/2017/1/20/DS1040-N.pdf, id=sw0002, Капустин=Капустин, Количество контактов=2, Корпус=6,54х9,9х5,5, Наименование=DS1040-02RN, Описание="2-х позиционный движковый переключатель", Производитель="Connfly Electronic Co. LTD", Промывка=Запрещена, Сопротивление контакта="100 мОм", Температура окружающей среды (корпуса), макс#="+105 °C", Температура окружающей среды (корпуса), мин#="-40 °C", Ток нагрузки="100 мА @ 24 В"
VD1: library part asmvd0007, HelpURL=https://www.st.com/resource/en/datasheet/usb6b1.pdf, id=asmvd0007, Корпус=SO-8, Наименование=USB6B1, Описание="Диодная сборка для защиты USB", Производитель="ST Microelectronics", Температура окружающей среды (корпуса), макс#="+85 °C", Температура окружающей среды (корпуса), мин#="-40 °C", Фамилия=Капустин
VD2: library part vd0004, HelpURL=https://www.onsemi.com/pub/Collateral/MBR140SFT1-D.PDF, id=vd0004, Корпус=SOD-123, Максимальное обратное напряжение="40 В", Максимальное прямое напряжение="0,88 В", Максимальный импульсный прямой ток="30 А", Максимальный обратный ток="10 мА @ Ta = 125°C", Максимальный прямой ток="1 А", Наименование=MBR140SFT1G, Описание="Диод Шоттки 40 В 1 А", Производитель="ON Semiconductor", Температура окружающей среды (корпуса), макс#="+125 °C", Температура окружающей среды (корпуса), мин#="-55 °C", Фамилия=Капустин
X1: library part 2108877-1_micro_usb-b, Contact_1=VBUS, Contact_2=D-, Contact_3=D+, Contact_4=ID, Contact_5=GND, Наименование=2108877-1
X2: library part cn0076, ClassName=+5V, Contact_01=+5V, Contact_02=MISO, Contact_03=MOSI, Contact_04=SCK, Contact_05=nCS, Contact_06=GND, HelpURL=http://www.connfly.com/userfiles/image/UpLoadFile/File/2015/1/29/DS1021.pdf, id=cn0076, Альтернатива="не указана", Количество контактов=6, Контакт=отсутствует, Наименование=DS1021-2*3SF11, Напряжение="250 В", Описание="PLS 6-ти контактный прямой двухрядный (2,54 мм)", Ответная часть=DS1023-2*3S22, Производитель="Connfly Electronic Co. LTD", Семейство=PLS, Температура окружающей среды (корпуса), макс#="+105 °C", Температура окружающей среды (корпуса), мин#="-40 °C", Тип вывода=Прямой, Ток на контакт="3 А", Фамилия=Капустин, Цвет=Черный, Шаг="2,54 мм"

## Via types
v1: diameter 0.6, hole 0.3, Top Layer to Bottom Layer, tented both sides, 104 vias
v2: diameter 0.6/0.6/0.6/0.6 (per signal layer), hole 0.3, Top Layer to Bottom Layer, 8 vias

## Nets (pads, with @x,y where several pads share a name; then routed paths per layer and width w, separated by ;. In a path a pad name is that pad's centre, name@x,y a point inside that pad or via, vN(x,y) a via of type N, cw(c..) or ccw(c..) an arc to the next point about the centre after c; other vN are vias at no path point)
+5V: C2.1 DD1.1 HL2.1 HL3.1 L1.2 R1.2 R2.1 R5.2 R6.2 VD2.1 | length 4.6
  Top Layer w0.15: R1.2 v1(9.575,8.525) ; v1(12,5.25) 12.25,5 HL2.1 ; v1(15.5,5.25) 15.75,5 HL3.1 ; R2.1 v1(36.4,17.775)
  other v1: 36,1 36.75,1 37.5,1 26.15,10.975 25.75,11.5 26.5,11.5 15.5,14.5 16.25,14.75 9.5,16.5 15.5,16.5 16.25,16.5 9.5,17.25 15.25,17.25 16,17.25 9.5,18.5 9.5,19.25
CN_5V_IN: VD1.1 X1.1 | length 3.1
  Top Layer w0.45: X1.1 7.007,12.6
  Top Layer w0.5: 7.007,12.6 7.3,12.893 7.3,13.125 7.83,13.655 VD1.1
CN_D_N: VD1.2 X1.2 | length 2.8
  Top Layer w0.155: X1.2 6.612,12 6.709,11.903 6.929,11.903 8.033,11.903 8.516,12.385 VD1.2
CN_D_P: VD1.3 X1.3 | length 2.8
  Top Layer w0.155: X1.3 6.612,11.5 6.709,11.597 7.055,11.597 8.033,11.597 8.516,11.115 VD1.3
CN_MISO: R9.2 X2.2 | length 5.9
  Top Layer w0.15: R9.2 42.6,7.35 X2.2
CN_MOSI: R7.2 X2.3 | length 8.9
  Top Layer w0.15: R7.2 44.1,8.85 X2.3
CN_nCS: R8.2 X2.5 | length 9.2
  Top Layer w0.15: R8.2 39.95,11.85 40.55,11.25 43.96,11.25 X2.5
CN_SCK: R10.2 X2.4 | length 6
  Top Layer w0.15: R10.2 39.425,10.35 39.775,10 X2.4
GND: 1.1 2.1 BQ1.2 C1.1 C2.2 C3.2 C4.2 DD1.20 HL1.2 S1.1 VD1.4 VD1.5 X1.5 X1.TP1 X2.6
  other v1: 5,1 7,1 9,1 11,1 13,1 15,1 17,1 19,1 21,1 23,1 25,1 27,1 29,1 31,1 33,1 35,1 39,1 41,1 5,2.5 20.5,2.5 19,5 19.75,5 20.5,5 21.25,5 22,5 39,5 40.5,5 46,5 19,5.75 38.5,6 41,6 19,6.5 19,7.25 19,8 7.5,8.5 11,8.5 22,9 31.5,9.5 33.5,9.5 6.25,10.865 7.525,10.99 15.2,11 5,12.5 15.2,12.5 37.5,13.5 40,13.5 22.5,15 40.5,15 46,15 29,15.5 31,15.5 18.475,15.525 38,16 5,17.5 1,19 3,19 5,19 7,19 24,19 27,19 29,19 31,19 36,19 38,19 40,19 42,19
  other v2: 10.4,11 12,11 16.8,11 10,11.8 11.6,11.8 10.4,12.6 12,12.6 16.8,12.6
MISO: DD1.13 R9.1 S2.4 | length 29.4
  Top Layer w0.15: v1(28.975,3.8) 29.325,3.45 DD1.13 ; v1(33.65,7.35) R9.1
  Bottom Layer w0.15: S2.4 20.26,11.95 18.5,11.95 17.5,10.95 17.5,10.375 23.15,4.725 27.125,4.725 28.05,3.8 v1(28.975,3.8) 30.1,3.8 v1(33.65,7.35)
MOSI: DD1.9 R7.1 | length 16.1
  Top Layer w0.15: DD1.9 v1(25.175,2.8) ; v1(34.4,8.85) R7.1
  Bottom Layer w0.15: v1(25.175,2.8) 27.125,2.8 27.825,2.1 29.525,2.1 34.4,6.975 v1(34.4,8.85)
nCS: DD1.5 R8.1 S2.2 | length 25.4
  Top Layer w0.15: DD1.5 v1(24.95,5.4) ; v1(33.65,11.85) R8.1
  Bottom Layer w0.15: S2.2 24.27,5.4 v1(24.95,5.4) 27.35,5.4 27.975,4.775 30.175,4.775 32.55,7.15 32.55,10.75 v1(33.65,11.85)
NetBQ1_1: BQ1.1 DD1.2 | length 3
  Top Layer w0.15: BQ1.1 21.087,8.225 21.262,8.05 21.85,8.05 22.538,7.362 23.463,7.362 DD1.2
NetBQ1_3: BQ1.3 DD1.3 | length 3
  Top Layer w0.15: BQ1.3 21.087,5.825 21.262,6 21.85,6 22.538,6.688 23.463,6.688 DD1.3
NetC3_1: C3.1 C4.1 DD1.17 | length 1.2
  Top Layer w0.4: DD1.17 31.85,6.05
NetHL1_1: HL1.1 R1.1 | length 2.6
  Top Layer w0.15: HL1.1 8.75,5.025 8.975,5.25 9.325,5.25 9.575,5.5 R1.1
NetHL2_2: HL2.2 R3.2 | length 2.6
  Top Layer w0.15: R3.2 13.05,5.6 13.3,5.35 13.65,5.35 13.875,5.125 HL2.2@13.875,4.1
NetHL3_2: HL3.2 R4.2 | length 2.6
  Top Layer w0.15: R4.2 16.475,5.6 16.725,5.35 17.075,5.35 17.3,5.125 HL3.2@17.3,4.1
NetL1_1: L1.1 VD1.8
NetR5_1: R5.1 S2.1 | length 7.3
  Top Layer w0.15: R5.1 v1(13.875,17.075)
  Bottom Layer w0.15: v1(13.875,17.075) 15.135,18.335 S2.1
NetR6_1: R6.1 S2.3 | length 10.2
  Top Layer w0.15: R6.1 v1(13.875,18.575)
  Bottom Layer w0.15: v1(13.875,18.575) 14.8,19.5 20.33,19.5 S2.3
NetVD2_2: VD2.2 X2.1 | length 11.9
  Top Layer w0.4: VD2.2 36.75,4.325 37.25,3.825 41.125,3.825 42.775,5.475 44.675,5.475 45.25,6.05 X2.1
nRST: C1.2 DD1.4 R2.2 S1.2 | length 25.7
  Top Layer w0.15: DD1.4 25.675,6.05 26.725,6.05 32.95,12.275 S1.2@32.95,13.875 ; S1.2@25.45,13.875 S1.2@32.95,13.875 ; R2.2 33.55,15.35 32.95,14.75 S1.2@32.95,13.875
SCK: DD1.11 R10.1 | length 13.9
  Top Layer w0.15: DD1.11 v1(32.375,2.15) ; v1(34.4,10.35) R10.1
  Bottom Layer w0.15: v1(32.375,2.15) 34.675,2.15 35.5,2.975 35.5,9.25 v1(34.4,10.35)
SPI_LINK: DD1.8 R3.1 | length 15.9
  Top Layer w0.15: R3.1 v1(13.05,8.625) ; v1(21.9,3.45) DD1.8
  Bottom Layer w0.15: v1(13.05,8.625) 13.05,4.6 14.2,3.45 v1(21.9,3.45)
USB_CFG: DD1.12 R4.1 | length 19.5
  Top Layer w0.15: R4.1 v1(16.475,8.625) ; v1(28.975,2.8) DD1.12
  Bottom Layer w0.15: v1(16.475,8.625) 16.475,5.3 17.675,4.1 26.825,4.1 28.125,2.8 v1(28.975,2.8)
USB_D_N: DD1.18 VD1.7 | length 21.4
  Top Layer w0.155: VD1.7 14.334,12.385 14.817,11.903 15.528,11.903 v1(16,12.375) ; v1(29.163,5.793) 29.163,6.213 29.65,6.7 DD1.18
  Bottom Layer w0.155: v1(16,12.375) 16.472,11.903 17.378,11.903 18.455,12.98 22.295,12.98 28.691,6.584 28.691,6.266 v1(29.163,5.793)
USB_D_P: DD1.19 VD1.6 | length 22.2
  Top Layer w0.155: VD1.6 14.334,11.115 14.817,11.597 15.528,11.597 v1(16,11.125) ; v1(27.913,5.793) 27.975,5.855 28.04,5.855 29.535,7.35 DD1.19
  Bottom Layer w0.155: v1(16,11.125) 16.472,11.597 17.504,11.597 18.581,12.675 22.169,12.675 28.386,6.458 28.386,6.266 v1(27.913,5.793)
pads on no net: DD1.6 DD1.7 DD1.10 DD1.14 DD1.15 DD1.16 X1.4

## Polygon pours and split planes (outlines as drawn)
GND on Top Layer "GND_L01_P026" (solid, remove dead copper, pour order 26): 0,20 47,20 47,0 0,0 0,4.3 0.645,4.945 0.645,15.055 0.006,15.694
+5V on Top Layer "+5V_L01_P018" (solid, remove dead copper, pour order 18): 35.5,3 38,3 38,0.5 35.5,0.5
+5V on Top Layer "+5V_L01_P016" (solid, remove dead copper, pour order 16): 14.9,14.675 15.575,14 16.2,14 16.675,14.475 16.675,17.2 16.2,17.675 15.2,17.675 14.9,17.375
GND on Top Layer "GND_L01_P010" (solid, remove dead copper, pour order 10): 18.375,8.975 18.375,5.15 19,4.525 22.35,4.525 22.35,5.35 19.45,5.35 19.45,6.5 21.875,6.5 21.875,7.525 19.475,7.525 19.475,8.7 22.35,8.7 22.35,9.6 19,9.6
+5V on Top Layer "+5V_L01_P008" (solid, remove dead copper, pour order 8): 11.05,19.75 9.4,19.75 8.75,19.1 8.75,16.6 9.375,15.975 11.025,15.975
NetL1_1 on Top Layer "NETL1_1_L01_P006" (solid, remove dead copper, pour order 6): 15.125,13 15.125,14.125 14.375,14.875 14.375,16.5 13.25,16.5 12.875,16.125 12.875,13.1 12.975,13
+5V on Top Layer "+5V_L01_P004" (solid, remove dead copper, pour order 4): 22.625,8.75 25.1,8.75 25.375,9.025 25.375,11.575 25.725,11.925 26.875,11.925 26.875,8.975 25.625,7.725 22.625,7.725
GND on Top Layer "GND_L01_P002" (solid, remove dead copper, pour order 2): 31.75,4.625 35.475,4.625 35.475,3.15 35.2,2.875 32.05,2.875 31.75,3.175
NetC3_1 on Top Layer "NETC3_1_L01_P000" (solid, remove dead copper, pour order 0): 31.75,5.125 31.75,6.6 34.975,6.6 35.525,6.05 35.525,5.125
+5V on Signal Layer 1 "+5V_L02_P020" (solid, remove dead copper, pour order 20): 0,20 47,20 47,0 0,0 0,4.3 0.7,5 0.7,15 0,15.7
GND on Signal Layer 1 "GND_L02_P012" (solid, remove dead copper, pour order 12): 5.775,13.15 23.075,13.15 28.475,7.75 31.8,7.75 31.8,6.325 31.775,6.3 29.775,6.3 29.625,6.15 29.625,5.275 27.875,5.275 27.25,5.9 27.25,7.2 23.9,10.55 15.95,10.55 5.785,10.55
GND on Signal Layer 2 "GND_L03_P022" (solid, remove dead copper, pour order 22): 0,20 47,20 47,0 0,0 0,4.3 0.7,5 0.7,15 0.006,15.694
GND on Bottom Layer "GND_L04_P024" (solid, remove dead copper, pour order 24): 0,20 47,20 47,0 0,0 0,4.3 0.645,4.945 0.645,14.955 0.006,15.594

## Silkscreen, mask and mechanical layers (free items; w line width, h text height)
Top Overlay:
  text "USB / SPI" at 38.55,16.05 h2
  text "RESET" at 27.525,11 h1.2
  text "PWR" at 7.95,1.7 h1.2
  text "LINK" at 11.45,1.7 h1.2
  text "USB" at 14.95,1.7 h1.2
Board:
  lines w0.1: 0,0 0,4.755 0.3,5.055 0.3,5.265 0.3,14.735 0.3,14.925 0,15.225 0,20 47,20 47,0 0,0
Assembly Notes (Mech5):
  text "'.title'" at 0,-2.05 h2
  text "'.project'_'.pcb_dec_number'['.Pcb_File_Name_No_Path']" at 0,-4.55 h2